# EAGLE board Arduino HomeMonitor (EAGLE 6.5.0)
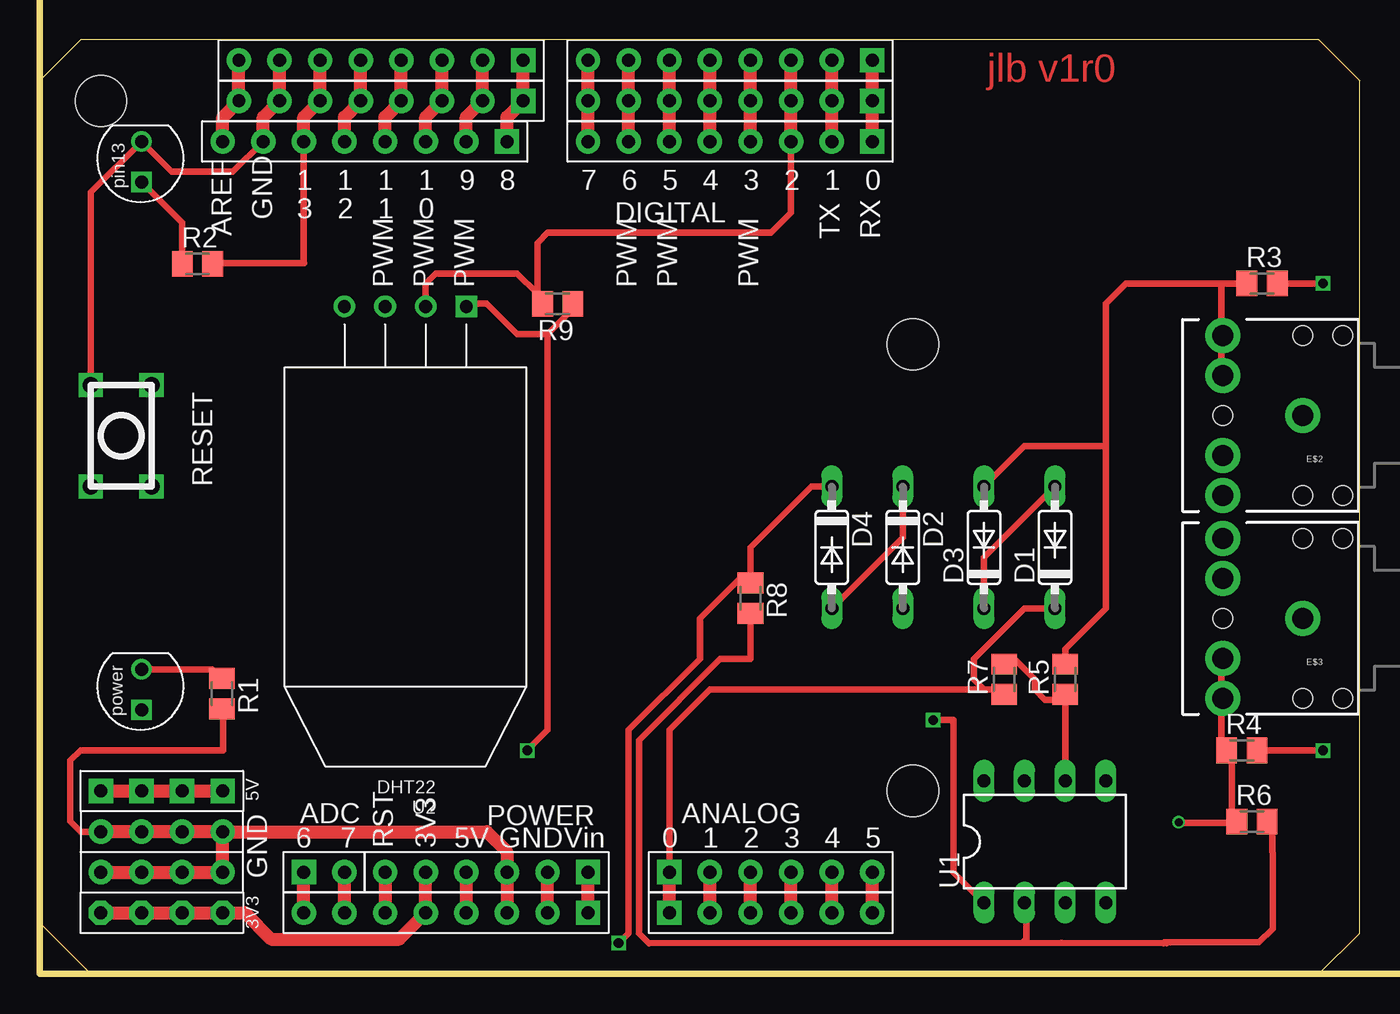
[diagram p0: board, top side]
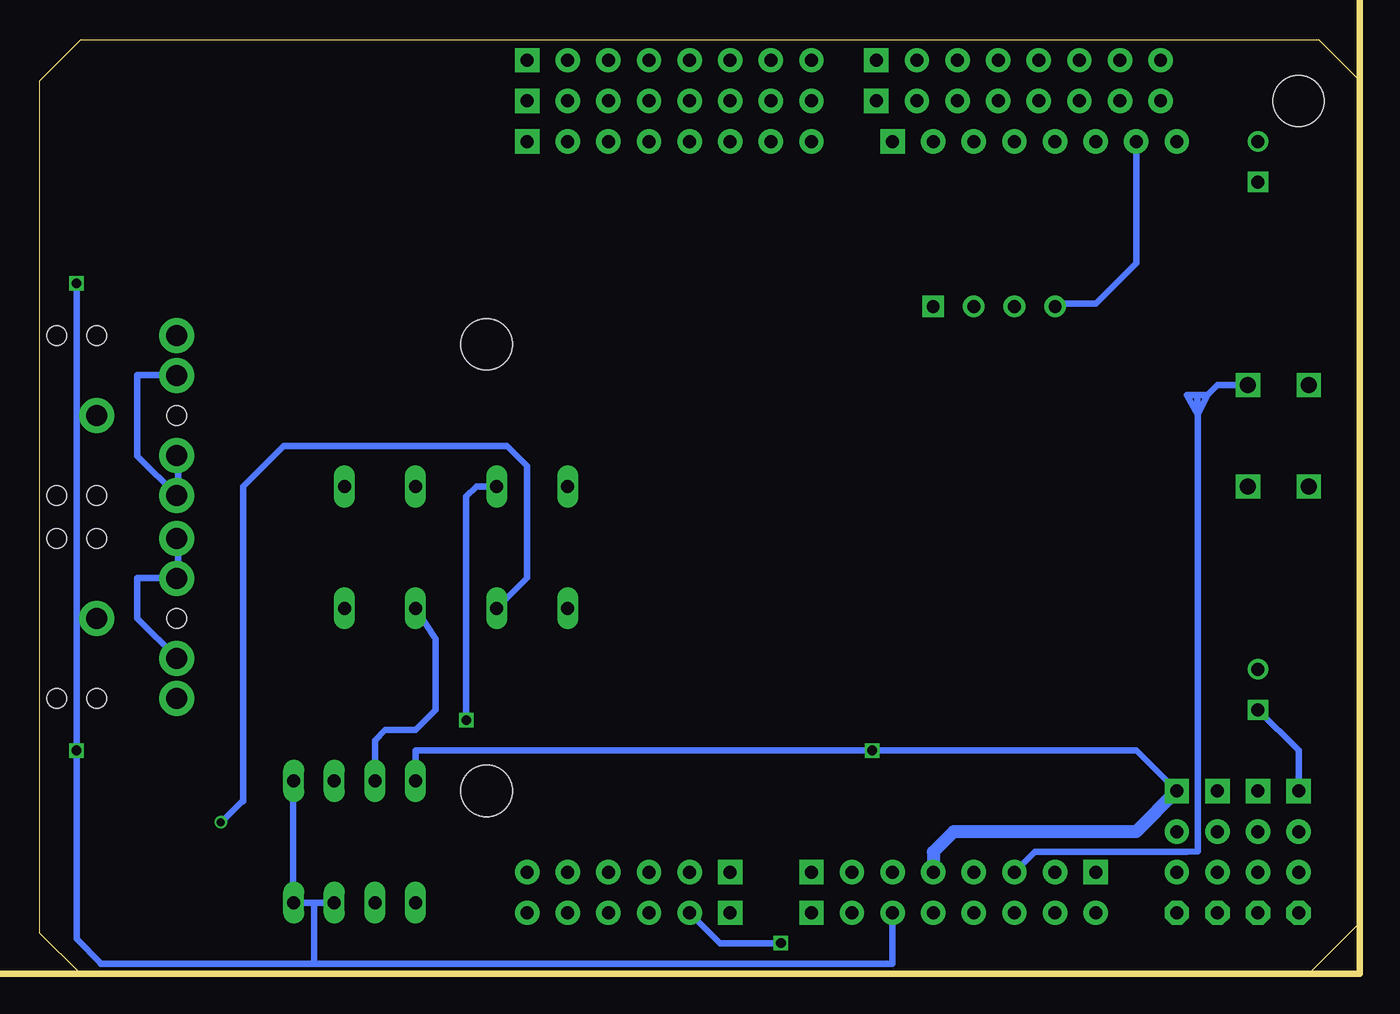
[diagram p1: board, bottom side, seen from below]

Size 82.55 x 58.42 mm. Coordinates in mm from the lower left corner, seen from the top.
Outline: 0,3.17 3.17,0 80.01,0 82.55,2.54 82.55,55.88 80.01,58.42 2.54,58.42 0,55.88 0,3.17
Copper layers (1*16): Top 0.035mm / dielectric 1.5mm / Bottom 0.035mm
Design rules "default": minimum track width 0.1mm, minimum drill 0.3mm, track to track 6mil, track to pad 6mil, pad to pad 6mil, via to via 6mil, smd to smd 6mil, copper to edge 10mil, drill to drill 10mil, minimum pad ring 10mil, minimum via ring 6mil, stop-mask expansion 2mil, vias tented up to drill 25mil, thermal gap 10mil
Net classes: 0 default: width 0.003 mm, drill 0.254 mm, clearance 0.152 mm
Holes 3.2 mm at 3.81,54.61 54.61,11.43 54.61,11.43 54.61,39.37
Milling: 4 lines

## Footprints (pad centres in the part's own frame; a part is rotated, then mirrored left to right if it is on the bottom)
CK_1*2 = drill 0.813 pad 1.524 square: 1 0,1.27 | drill 0.813 pad 1.524: 2 0,-1.27
DO35-7 = drill 0.813 long: A 3.81,0; C -3.81,0
AUDIO-JACK = drill 1.3 pad 2.184: RING 5,5; RSH 5,2.5; SLEEVE 0,0; TIP 5,-5; TSH 5,-2.5 | hole 1.2: 0,5; -2.5,5; -2.5,-5; 0,-5; 5,0
CK_1X8 = drill 0.813 pad 1.524 square: 1 0,8.89 | drill 0.813 pad 1.524: 2 0,6.35; 3 0,3.81; 4 0,1.27; 5 0,-1.27; 6 0,-3.81; 7 0,-6.35; 8 0,-8.89
CK_1*6 = drill 0.813 pad 1.524 square: 1 0,6.35 | drill 0.813 pad 1.524: 2 0,3.81; 3 0,1.27; 4 0,-1.27; 5 0,-3.81; 6 0,-6.35
M0805 = smd 1.3 x 1.6: 1 -0.95,0; 2 0.95,0
DIL08 = drill 0.813 long: 1 -3.81,-3.81; 2 -1.27,-3.81; 3 1.27,-3.81; 4 3.81,-3.81; 5 3.81,3.81; 6 1.27,3.81; 7 -1.27,3.81; 8 -3.81,3.81
AM2302 = drill 0.8 pad 1.35 square: P$1 -3.81,-13.8 | drill 0.8 pad 1.35: P$2 -1.27,-13.8; P$3 1.27,-13.8; P$4 3.81,-13.8

## Placement (x,y rotation side)
ADC6_7  CK_12  [CK_1*2]  17.78,6.35 90 top
D1  1N914  [DO35-7]  63.5,26.67 90 top
D2  1N914  [DO35-7]  53.98,26.67 270 top
D3  1N914  [DO35-7]  59.05,26.67 90 top
D4  1N914  [DO35-7]  49.53,26.67 270 top
E$2  [AUDIO-JACK]  78.99,34.92 180 top
E$3  [AUDIO-JACK]  78.99,22.23 180 top
PB  CK_1X8  [CK_1X8]  21.34,54.61 270 top
PB1  CK_1X8  [CK_1X8]  20.32,52.07 270 top
PB2  CK_1X8  [CK_1X8]  21.34,57.15 270 top
PC  [CK_1*6]  45.72,6.35 90 top
PC1  [CK_1*6]  45.72,3.81 90 top
PD  CK_1X8  [CK_1X8]  43.18,54.61 270 top
PD1  CK_1X8  [CK_1X8]  43.18,52.07 270 top
PD2  CK_1X8  [CK_1X8]  43.18,57.15 270 top
PD3  CK_1X8  [CK_1X8]  25.4,3.81 270 top
POWER  [CK_1*6]  27.94,6.35 270 top
R1  10k  [M0805]  11.38,17.52 270 top
R2  10k  [M0805]  9.86,44.41 0 top
R3  150  [M0805]  76.45,43.18 0 top
R4  150  [M0805]  75.18,13.97 0 top
R5  10k  [M0805]  64.14,18.41 90 top
R6  10k  [M0805]  75.82,9.53 0 top
R7  10k  [M0805]  60.33,18.41 90 top
R8  10k  [M0805]  44.45,23.5 270 top
R9  10k  [M0805]  32.38,41.91 180 top
U1  LM358N  [DIL08]  62.87,8.26 0 top
U2  DHT22  [AM2302]  22.86,27.94 180 top

## Library data of the parts
ADC6_7 PB PB1 PB2 PC PC1 PD PD1-PD3 POWER = CONNECTER
D1-D4 R1-R9 U1 = adafruit
E$2 E$3 = SparkFun-Connectors
U2 = sensor

## Nets
3V3: PD3.5 POWER.5
5V: PD3.4 POWER.4 U1.8
---: PD3.3 POWER.3
LED-: PB1.7 PB2.7 PB.7
RST: PD3.6 POWER.6
RX: PD1.1 PD2.1 PD.1
S$3: PC1.4 PC.4
S$4: PC1.3 PC.3
S$5: D1.A D3.C U1.7
S$7: D1.C PC1.1 PC.1
S$9: D2.C D4.A U1.1
S$11: U1.6
S$12: D3.A
S$13: D4.C PC1.2 PC.2
S$15: D2.A
S$16: E$2.SLEEVE E$3.SLEEVE
S$22: U1.3 U1.4
S$168: PB1.6 PB2.6 PB.6
S$171: PD3.1 POWER.1
S$172: PD3.2 POWER.2
S$174: ADC6_7.1 PD3.8
S$177: ADC6_7.2 PD3.7
S$179: PD1.4 PD2.4 PD.4
S$180: PD1.3 PD2.3 PD.3
S$181: PD1.5 PD2.5 PD.5
S$182: PD1.6 PD2.6 PD.6
S$183: PD1.7 PD2.7 PD.7
S$184: PD1.8 PD2.8 PD.8
S$185: PB1.1 PB2.1 PB.1
S$186: PB1.2 PB2.2 PB.2
S$187: PB1.3 PB2.3 PB.3
S$188: PB1.4 PB2.4 PB.4
S$189: PB1.5 PB2.5 PB.5
S$191: PB1.8 PB2.8 PB.8
SCL: PC1.6 PC.6
SDA: PC1.5 PC.5
TX: PD1.2 PD2.2 PD.2

## Tracks (layer width: path | path; a pad name or v marks a point on that pad's centre or on a via)
3V3  (via drill 0.81 pad 1.52)
  Top 0.813: POWER.5 PD3.5 22.48,2.16 14.48,2.16 12.83,3.81 v11.43,3.81 v8.89,3.81 v6.35,3.81 v3.81,3.81
5V  (via drill 0.6, 0.81 pad 1.27, 0.81 pad 1.52)
  Top 0.406: 26.67,41.91 27.94,41.91 29.84,40.01 31.75,40.01 | 33.66,41.91 31.75,40.01 | 31.75,40.01 31.75,15.24 v30.48,13.97
  Top 0.813: POWER.4 PD3.4 | v11.43,11.43 v8.89,11.43 v6.35,11.43 v3.81,11.43
  Bottom 0.406: v3.81,11.43 3.81,13.97 v6.35,16.51 | U1.8 59.05,13.97 v30.48,13.97 13.97,13.97 v11.43,11.43
  Bottom 0.813: POWER.4 26.67,7.62 25.4,8.89 13.97,8.89 v11.43,11.43
---  (via drill 0.81 pad 1.52)
  Top 0.406: v3.81,8.89 2.54,8.89 1.91,9.53 1.91,13.34 2.54,13.97 11.43,13.97
  Top 0.813: PD3.3 POWER.3 29.21,7.62 27.94,8.89 v11.43,8.89 | v3.81,6.35 v6.35,6.35 v8.89,6.35 v11.43,6.35 v11.43,8.89 | v3.81,8.89 v6.35,8.89 v8.89,8.89 v11.43,8.89
  Bottom 0.406: 78.74,0.64 29.21,0.64 PD3.3
LED+  (via drill 0.81 pad 1.27)
  Top 0.406: 8.89,44.45 8.89,46.99 v6.35,49.53
LED-  (via drill 0.81 pad 1.27, 1.02 pad 1.52)
  Top 0.406: PB1.7 12.06,50.16 8.26,50.16 v6.35,52.07 3.17,48.9 v3.17,36.83 v3.17,30.48
  Top 0.813: PB1.7 13.97,53.59 PB.7 PB2.7
LED-1  (via drill 0.81 pad 1.27)
  Top 0.406: v6.35,19.05 8.89,19.05
RST  (via drill 1.02 pad 1.52)
  Top 0.406: v6.99,36.83 v6.99,30.48
  Top 0.813: POWER.6 PD3.6
  Bottom 0.406: POWER.6 20.32,7.62 10.79,7.62 10.12,7.66 10.12,34.97 | v6.99,36.83 8.89,36.83 9.53,36.2 | 10.16,36.2 9.53,36.2 | 10.12,34.97 10.16,36.2 | 10.12,34.97 9.53,36.2 | 10.16,36.2 10.79,36.2 10.12,34.97
RX
  Top 0.813: PD1.1 PD.1 PD2.1
S$1
  Bottom 0.406: 13.97,51.44 13.97,44.45 16.51,41.91 19.05,41.91
S$2
  Top 0.406: 74.55,9.53 74.55,13.97 73.91,13.97 73.91,19.68
S$3
  Top 0.813: PC1.4 PC.4
S$4
  Top 0.813: PC1.3 PC.3
S$5
  Top 0.406: D3.C 59.05,26.04 D1.A
  Bottom 0.406: D3.C 57.78,20.95 57.78,16.51 59.05,15.24 60.96,15.24 61.59,14.61 U1.7
S$6
  Bottom 0.406: 73.91,19.68 76.45,22.23 76.45,24.77 73.91,24.77 73.91,27.3
S$7
  Top 0.406: D1.C 61.59,22.86 58.42,19.68 58.42,18.41 59.05,17.78 | 59.05,17.78 60.33,17.78 | 59.05,17.78 41.91,17.78 39.37,15.24 PC.1
  Top 0.813: PC1.1 PC.1
S$8
  Bottom 0.406: 73.91,32.38 73.91,29.84 76.45,32.38 76.45,37.47 73.91,37.47
S$9  (via drill 0.6)
  Top 0.406: D2.C 53.98,27.3 D4.A | v55.88,15.88 57.15,15.88 57.15,6.35 U1.1
  Bottom 0.406: D2.C 55.24,30.48 55.88,29.84 v55.88,15.88
S$10
  Top 0.406: 70.48,1.91 63.89,1.93 38.1,1.91 37.47,2.54 37.47,14.61 42.55,19.68 44.45,19.68 44.45,22.86
S$11
  Top 0.406: U1.6 64.14,17.14 62.87,17.14 62.23,17.78 62.23,18.41 60.96,19.68
S$12
  Top 0.406: 64.14,19.05 64.14,20.32 66.67,22.86 66.67,33.02 | 66.67,33.02 66.67,41.91 67.94,43.18 73.91,43.18 | 75.18,43.18 73.91,43.18 | 73.91,43.18 73.91,37.47 | 66.67,33.02 61.59,33.02 D3.A
S$13  (via drill 0.6)
  Top 0.406: D4.C 48.26,30.48 44.45,26.67 44.45,24.77 43.81,24.77 41.27,22.23 41.27,19.68 36.83,15.24 36.83,2.54 v36.2,1.91
  Top 0.813: PC1.2 PC.2
  Bottom 0.406: v36.2,1.91 40.01,1.91 PC1.2
S$14
  Top 0.406: 24.13,41.91 24.13,43.18 24.77,43.81 29.84,43.81 31.11,42.55 31.11,45.72 31.75,46.35 45.72,46.35 46.99,47.62 46.99,52.07
S$15
  Bottom 0.406: 69.85,10.79 69.85,30.48 67.31,33.02 53.34,33.02 52.07,31.75 52.07,24.77 D2.A
S$16  (via drill 0.6)
  Top 0.406: v80.26,43.18 77.09,43.18 | 75.82,13.97 v80.26,13.97
  Bottom 0.406: 80.26,34.92 E$2.SLEEVE | v80.26,43.18 80.26,34.92 | E$3.SLEEVE 80.26,22.23 | 80.26,22.23 80.26,34.92 | 80.26,22.23 v80.26,13.97
S$17
  Bottom 0.406: 80.26,14 80.26,2.18 78.73,0.66
S$18
  Top 0.406: 77.09,9.53 77.09,7.62
S$19
  Top 0.406: 77.11,7.53 77.11,2.81 76.25,1.96 70.33,1.96 70.29,1.91
S$20
  Bottom 0.406: 71.23,9.45 69.85,10.83
S$21
  Bottom 0.406: 66.71,4.61 66.71,12.01 66.62,12.09
S$22
  Bottom 0.406: U1.3 U1.4
S$23
  Bottom 0.406: 65.4,4.44 65.4,0.73 65.36,0.69
S$24
  Top 0.406: 61.71,4.52 61.71,2.18 61.55,2.03
S$25
  Top 0.406: 8.79,19.03 10.78,19.03 11.24,18.57
S$26
  Top 0.406: 11.46,13.96 11.46,16.45 11.33,16.58
S$27
  Top 0.406: 16.52,44.45 10.89,44.45 10.75,44.3
S$28  (via drill 0.5 pad 0.25)
  other vias: 71.23,9.48
S$29
  Top 0.406: 71.26,9.42 74.75,9.42 74.81,9.48
S$168
  Top 0.406: 16.51,44.45 PB1.6
  Top 0.813: PB2.6 PB.6 16.51,53.59 PB1.6
S$171
  Top 0.813: PD3.1 POWER.1
S$172
  Top 0.813: PD3.2 POWER.2
S$174
  Top 0.813: PD3.8 ADC6_7.1
S$177
  Top 0.813: PD3.7 ADC6_7.2
S$179
  Top 0.813: PD1.4 PD.4 PD2.4
S$180
  Top 0.813: PD1.3 PD.3 PD2.3
S$181
  Top 0.813: PD1.5 PD.5 PD2.5
S$182
  Top 0.813: PD2.6 PD.6 PD1.6
S$183
  Top 0.813: PD1.7 PD.7 PD2.7
S$184
  Top 0.813: PD2.8 PD.8 PD1.8
S$185
  Top 0.813: PB1.1 29.21,53.59 PB.1 PB2.1
S$186
  Top 0.813: PB1.2 26.67,53.59 PB.2 PB2.2
S$187
  Top 0.813: PB1.3 24.13,53.59 PB.3 PB2.3
S$188
  Top 0.813: PB2.4 PB.4 21.59,53.59 PB1.4
S$189
  Top 0.813: PB1.5 19.05,53.59 PB.5 PB2.5
S$191
  Top 0.813: PB1.8 11.43,53.59 PB.8 PB2.8
SCL
  Top 0.813: PC1.6 PC.6
SDA
  Top 0.813: PC1.5 PC.5
TX
  Top 0.813: PD2.2 PD.2 PD1.2

## Text on the board
Top: jlb v1r0
tPlace: pin13 | 1 | 1 | 1 | 1 | 9 | 8 | 7 | 6 | 5 | 4 | 3 | 2 | 1 | 0 | GND | 3 | 2 | 1 | 0 | DIGITAL | AREF | TX | RX | PWM | PWM | PWM | PWM | PWM | PWM | RESET | power | 5V | ADC | POWER | ANALOG | 6 | 7 | RST | 3V3 | 5V | GND | Vin | 0 | 1 | 2 | 3 | 4 | 5 | GND | 3V3